# EAGLE board 16 ch sample-and-hold card - single-sided - w logo - panelized (EAGLE 6.5.0), part 1 of 2
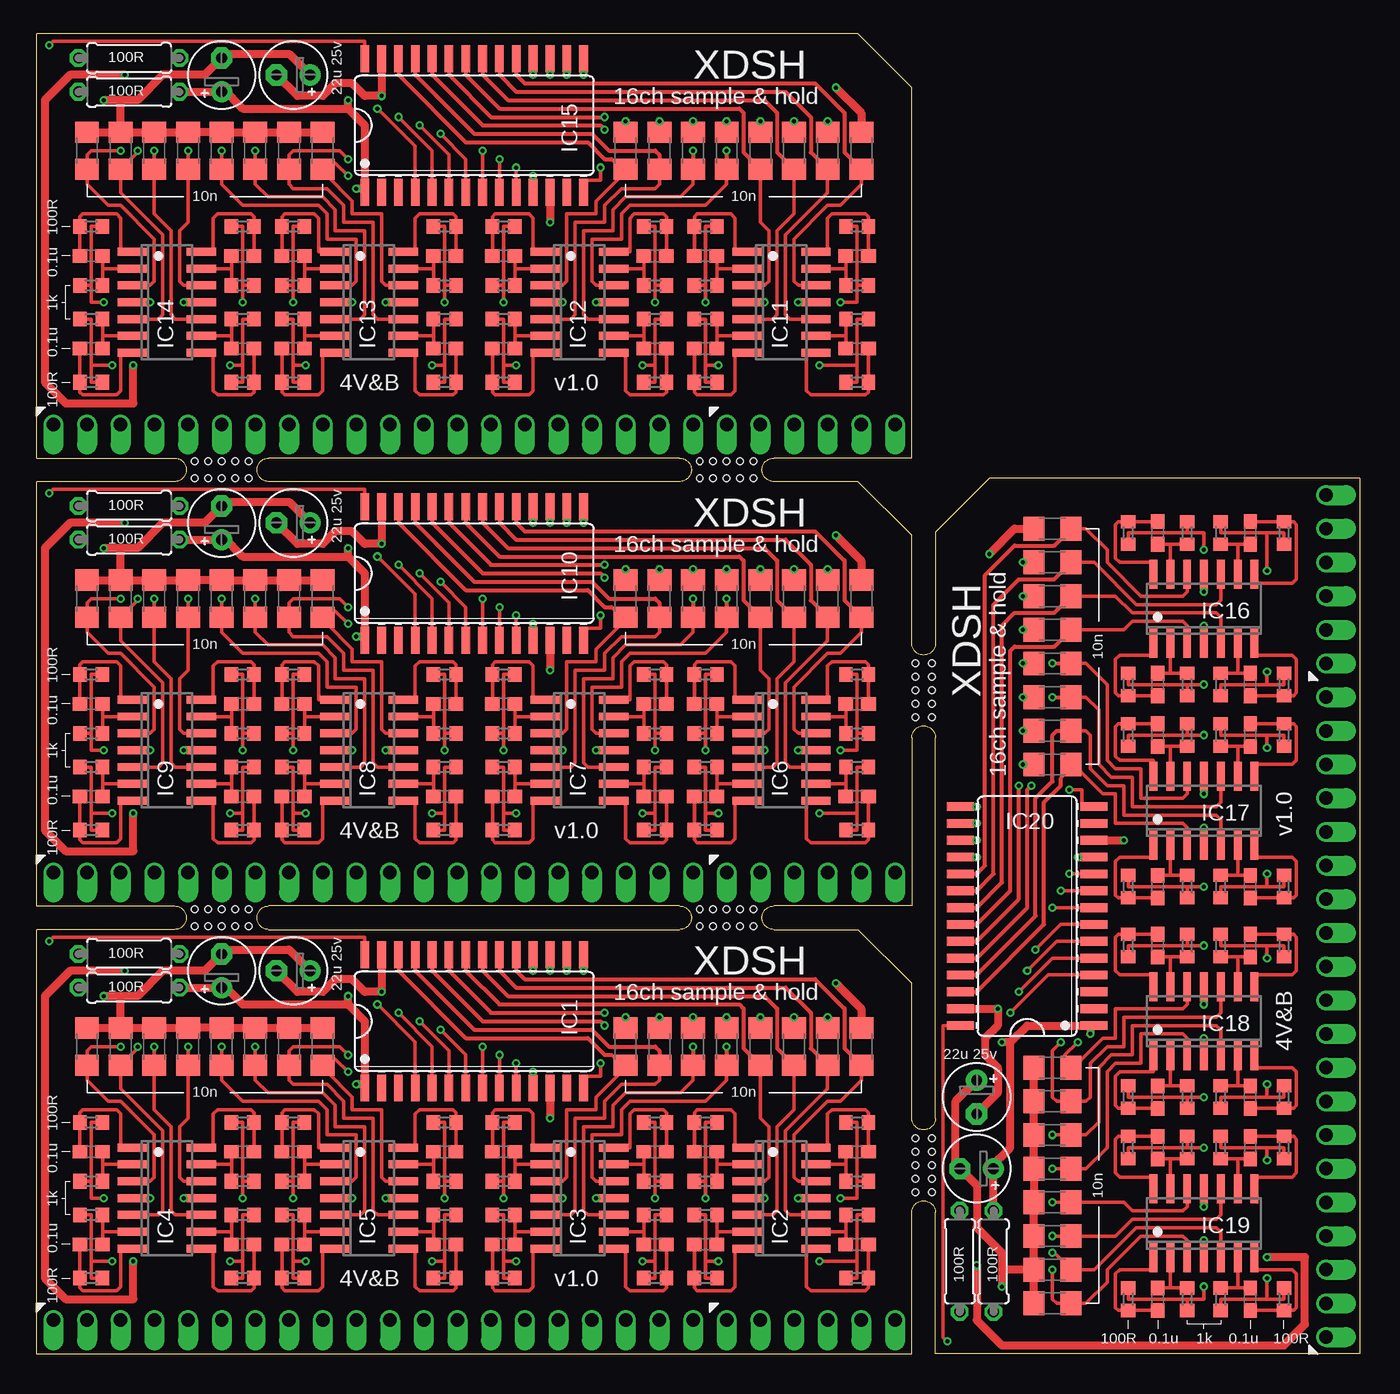
[diagram p0: board, top side]
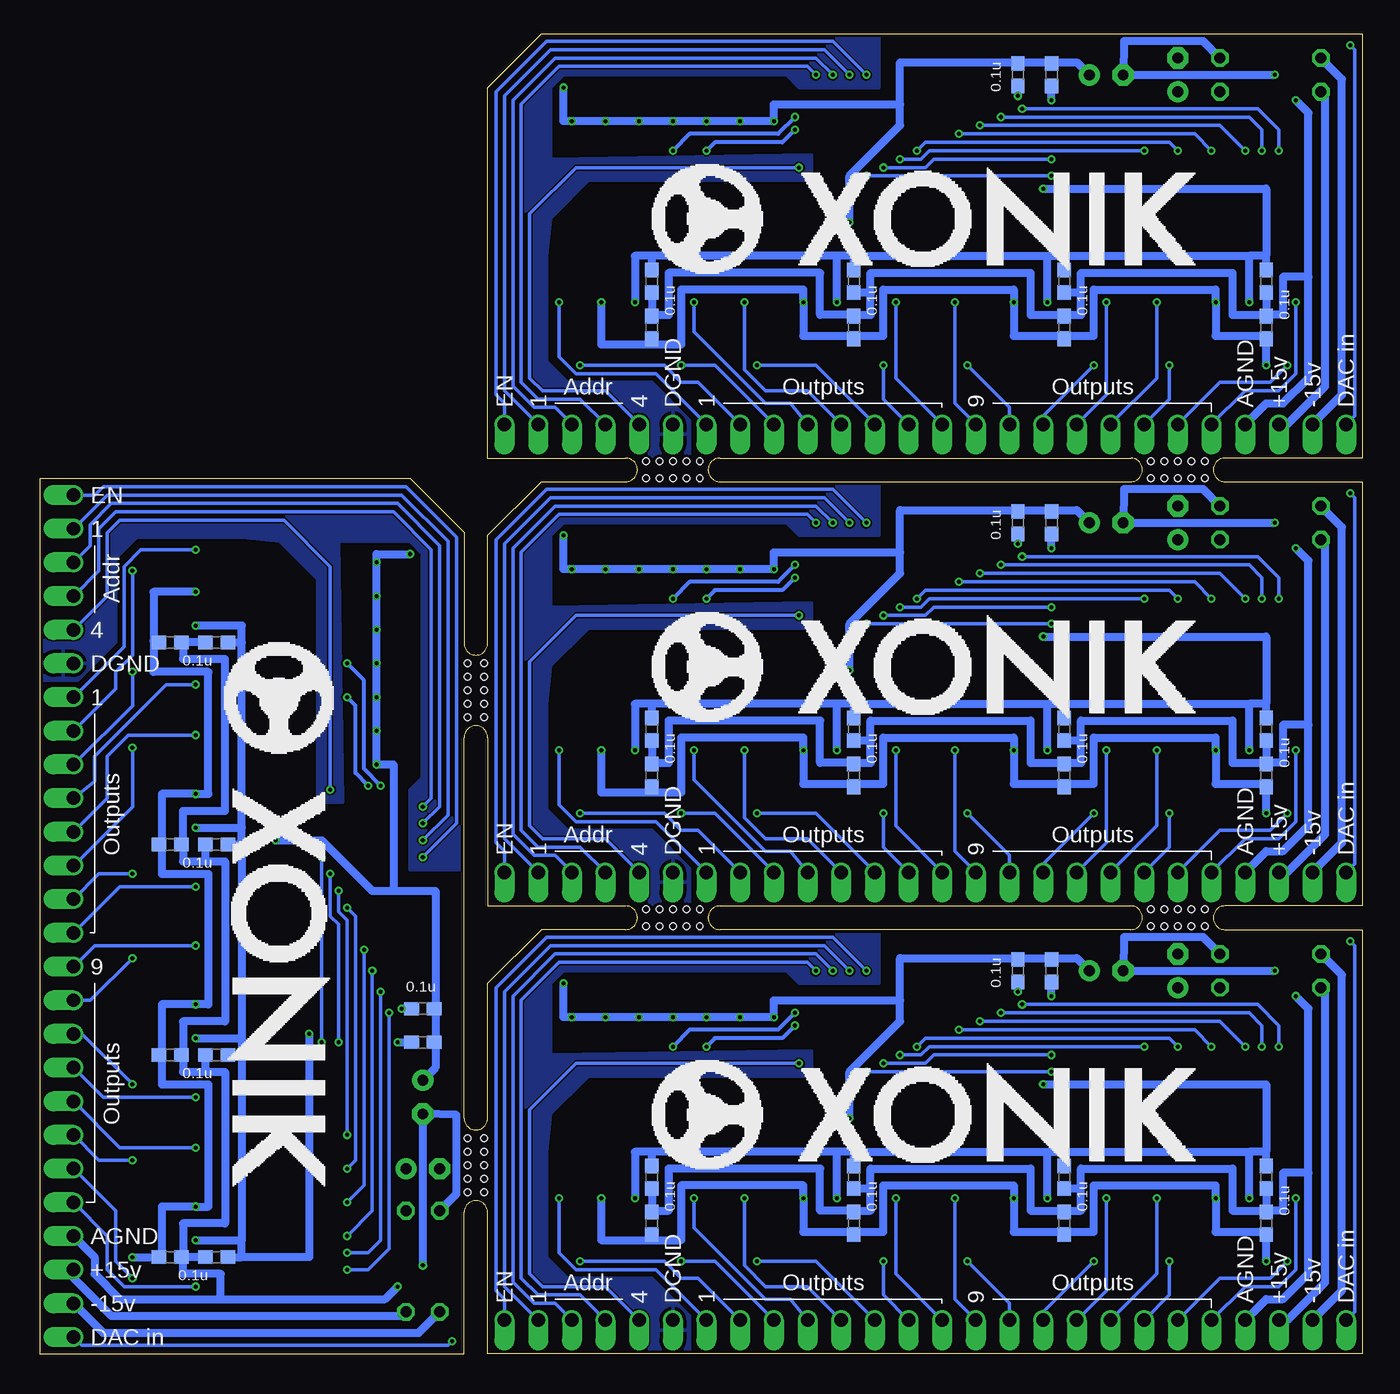
[diagram p1: board, bottom side, seen from below]

Size 99.82 x 99.57 mm. Coordinates in mm from the lower left corner, seen from the top.
Outline: 0,0 66.04,0 66.04,10.67 arc-180 67.82,10.67 67.82,0 99.82,0 99.82,66.04 71.88,66.04 67.82,61.98 67.82,53.59 arc-180 66.04,53.59 66.04,61.72 61.98,65.79 55.63,65.79 arc-180 55.63,67.56 66.04,67.56 66.04,95.5 61.98,99.57 0,99.57 0,67.56 10.41,67.56 arc-180 10.41,65.79 0,65.79 0,33.78 10.41,33.78 arc-180 10.41,32 0,32 0,0
Outline: 66.04,27.94 61.98,32 55.63,32 arc-180 55.63,33.78 66.04,33.78 66.04,46.48 arc-180 67.82,46.48 67.82,17.78 arc-180 66.04,17.78 66.04,27.94
Outline: 17.53,32 arc-180 17.53,33.78 48.51,33.78 arc-180 48.51,32 17.53,32
Outline: 48.51,65.79 17.53,65.79 arc-180 17.53,67.56 48.51,67.56 arc-180 48.51,65.79
Copper layers (1*16): Top 0.035mm / dielectric 1.5mm / Bottom 0.035mm
Design rules "dirt_cheap_dirty_boards.v1": minimum track width 5mil, minimum drill 12mil, track to track 5mil, track to pad 5mil, pad to pad 5mil, via to via 5mil, smd to smd 0mil, copper to edge 10mil, drill to drill 10mil, minimum pad ring 10mil, minimum via ring 6mil, stop-mask expansion 2mil, vias tented up to drill 25mil, thermal gap 10mil
Holes 0.5 mm at 11.94,66.04 12.95,66.04 13.97,66.04 14.99,66.04 16,66.04 50.04,66.04 51.05,66.04 52.07,66.04 53.09,66.04 54.1,66.04 11.94,32.26 12.95,32.26 13.97,32.26 14.99,32.26 16,32.26 16,33.53 14.99,33.53 13.97,33.53 12.95,33.53 11.94,33.53 50.04,32.26 51.05,32.26 52.07,32.26 53.09,32.26 54.1,32.26 54.1,33.53 53.09,33.53 52.07,33.53 51.05,33.53 50.04,33.53 16,67.31 14.99,67.31 13.97,67.31 12.95,67.31 11.94,67.31 54.1,67.31 53.09,67.31 52.07,67.31 51.05,67.31 50.04,67.31 67.56,48.01 67.56,49.02 67.56,50.04 67.56,51.05 67.56,52.07 66.29,52.07 66.29,51.05 66.29,50.04 66.29,49.02 66.29,48.01 67.56,12.19 67.56,13.21 67.56,14.22 67.56,15.24 67.56,16.26 66.29,16.26 66.29,15.24 66.29,14.22 66.29,13.21 66.29,12.19

## Footprints (pad centres in the part's own frame; a part is rotated, then mirrored left to right if it is on the bottom)
C0603 = smd 1.1 x 1: 1 -0.85,0; 2 0.85,0
E2,5-5 = drill 0.813 pad 1.6: + -1.27,0 | drill 0.813 pad 1.6 octagon: - 1.27,0
C1206 = smd 1.6 x 1.8: 1 -1.4,0; 2 1.4,0
SO28L = smd 0.66 x 2.032: 1 -8.255,-5.029; 2 -6.985,-5.029; 3 -5.715,-5.029; 4 -4.445,-5.029; 5 -3.175,-5.029; 6 -1.905,-5.029; 7 -0.635,-5.029; 8 0.635,-5.029; 9 1.905,-5.029; 10 3.175,-5.029; 11 4.445,-5.029; 12 5.715,-5.029; 13 6.985,-5.029; 14 8.255,-5.029; 15 8.255,5.029; 16 6.985,5.029; 17 5.715,5.029; 18 4.445,5.029; 19 3.175,5.029; 20 1.905,5.029; 21 0.635,5.029; 22 -0.635,5.029; 23 -1.905,5.029; 24 -3.175,5.029; 25 -4.445,5.029; 26 -5.715,5.029; 27 -6.985,5.029; 28 -8.255,5.029
SO14 = smd 0.6 x 2.2: 1 -3.81,-2.6; 2 -2.54,-2.6; 3 -1.27,-2.6; 4 0,-2.6; 5 1.27,-2.6; 6 2.54,-2.6; 7 3.81,-2.6; 8 3.81,2.6; 9 2.54,2.6; 10 1.27,2.6; 11 0,2.6; 12 -1.27,2.6; 13 -2.54,2.6; 14 -3.81,2.6
0207/7 = drill 0.813 octagon: 1 -3.81,0; 2 3.81,0
R0603 = smd 1 x 1.1: 1 -0.85,0; 2 0.85,0
SIP-PIN20-1J = drill 1.016 offset: 1 -24.13,0; 2 -21.59,0; 3 -19.05,0; 4 -16.51,0; 5 -13.97,0; 6 -11.43,0; 7 -8.89,0; 8 -6.35,0; 9 -3.81,0; 10 -1.27,0; 11 1.27,0; 12 3.81,0; 13 6.35,0; 14 8.89,0; 15 11.43,0; 16 13.97,0; 17 16.51,0; 18 19.05,0; 19 21.59,0; 20 24.13,0
SIP-PIN06-1J = drill 1.016 offset: 1 -6.35,0; 2 -3.81,0; 3 -1.27,0; 4 1.27,0; 5 3.81,0; 6 6.35,0

## Placement (x,y rotation side)
C1  0.1uF  [C0603]  26.04,28.89 90 bottom
C2  22uF 25V  [E2,5-5]  19.37,28.89 180 top
C3  22uF 25V  [E2,5-5]  13.97,28.89 90 top
C4  10nF  [C1206]  62.23,23.18 270 top
C5  10nF  [C1206]  59.69,23.18 270 top
C6  10nF  [C1206]  57.15,23.18 270 top
C7  10nF  [C1206]  54.61,23.18 270 top
C8  10nF  [C1206]  52.07,23.18 270 top
C9  10nF  [C1206]  49.53,23.18 270 top
C10  10nF  [C1206]  46.99,23.18 270 top
C11  10nF  [C1206]  44.45,23.18 270 top
C12  0.1uF  [C0603]  53.66,13.34 270 bottom
C13  0.1uF  [C0603]  38.42,13.34 270 bottom
C14  0.1uF  [C0603]  61.91,15.24 180 top
C15  0.1uF  [C0603]  61.91,8.26 180 top
C16  0.1uF  [C0603]  50.48,8.26 0 top
C17  0.1uF  [C0603]  50.48,15.24 0 top
C18  0.1uF  [C0603]  46.67,15.24 180 top
C19  0.1uF  [C0603]  46.67,8.26 180 top
C20  0.1uF  [C0603]  35.24,8.26 0 top
C21  0.1uF  [C0603]  35.24,15.24 0 top
C22  10nF  [C1206]  11.43,23.18 270 top
C23  10nF  [C1206]  8.89,23.18 270 top
C24  10nF  [C1206]  6.35,23.18 270 top
C25  10nF  [C1206]  3.81,23.18 270 top
C26  10nF  [C1206]  21.59,23.18 270 top
C27  10nF  [C1206]  19.05,23.18 270 top
C28  10nF  [C1206]  16.51,23.18 270 top
C29  10nF  [C1206]  13.97,23.18 270 top
C30  0.1uF  [C0603]  7.3,13.34 270 bottom
C31  0.1uF  [C0603]  22.54,13.34 270 bottom
C32  0.1uF  [C0603]  15.56,15.24 180 top
C33  0.1uF  [C0603]  15.56,8.26 180 top
C34  0.1uF  [C0603]  4.13,8.26 0 top
C35  0.1uF  [C0603]  4.13,15.24 0 top
C36  0.1uF  [C0603]  30.8,15.24 180 top
C37  0.1uF  [C0603]  30.8,8.26 180 top
C38  0.1uF  [C0603]  19.37,8.26 0 top
C39  0.1uF  [C0603]  19.37,15.24 0 top
C40  0.1uF  [C0603]  23.5,28.89 270 bottom
C41  0.1uF  [C0603]  7.3,9.84 270 bottom
C42  0.1uF  [C0603]  22.54,9.84 270 bottom
C43  0.1uF  [C0603]  38.42,9.84 270 bottom
C44  0.1uF  [C0603]  53.66,9.84 270 bottom
C45  10nF  [C1206]  54.61,56.96 270 top
C46  10nF  [C1206]  57.15,56.96 270 top
C47  10nF  [C1206]  59.69,56.96 270 top
C48  0.1uF  [C0603]  50.48,49.02 0 top
C49  0.1uF  [C0603]  50.48,42.04 0 top
C50  10nF  [C1206]  62.23,56.96 270 top
C51  0.1uF  [C0603]  61.91,42.04 180 top
C52  0.1uF  [C0603]  61.91,49.02 180 top
C53  0.1uF  [C0603]  53.66,47.12 270 bottom
C54  10nF  [C1206]  44.45,56.96 270 top
C55  10nF  [C1206]  46.99,56.96 270 top
C56  10nF  [C1206]  49.53,56.96 270 top
C57  10nF  [C1206]  52.07,56.96 270 top
C58  0.1uF  [C0603]  35.24,49.02 0 top
C59  0.1uF  [C0603]  35.24,42.04 0 top
C60  0.1uF  [C0603]  46.67,42.04 180 top
C61  0.1uF  [C0603]  46.67,49.02 180 top
C62  0.1uF  [C0603]  38.42,47.12 270 bottom
C63  10nF  [C1206]  13.97,56.96 270 top
C64  10nF  [C1206]  16.51,56.96 270 top
C65  10nF  [C1206]  19.05,56.96 270 top
C66  10nF  [C1206]  21.59,56.96 270 top
C67  0.1uF  [C0603]  19.37,49.02 0 top
C68  0.1uF  [C0603]  19.37,42.04 0 top
C69  0.1uF  [C0603]  30.8,42.04 180 top
C70  0.1uF  [C0603]  30.8,49.02 180 top
C71  0.1uF  [C0603]  22.54,47.12 270 bottom
C72  10nF  [C1206]  3.81,56.96 270 top
C73  10nF  [C1206]  6.35,56.96 270 top
C74  10nF  [C1206]  8.89,56.96 270 top
C75  10nF  [C1206]  11.43,56.96 270 top
C76  0.1uF  [C0603]  4.13,49.02 0 top
C77  0.1uF  [C0603]  4.13,42.04 0 top
C78  0.1uF  [C0603]  15.56,42.04 180 top
C79  0.1uF  [C0603]  15.56,49.02 180 top
C80  0.1uF  [C0603]  7.3,47.12 270 bottom
C81  0.1uF  [C0603]  26.04,62.67 90 bottom
C82  22uF 25V  [E2,5-5]  19.37,62.67 180 top
C83  22uF 25V  [E2,5-5]  13.97,62.67 90 top
C84  0.1uF  [C0603]  23.5,62.67 270 bottom
C85  0.1uF  [C0603]  7.3,43.62 270 bottom
C86  0.1uF  [C0603]  22.54,43.62 270 bottom
C87  0.1uF  [C0603]  38.42,43.62 270 bottom
C88  0.1uF  [C0603]  53.66,43.62 270 bottom
C89  10nF  [C1206]  54.61,90.74 270 top
C90  10nF  [C1206]  57.15,90.74 270 top
C91  10nF  [C1206]  59.69,90.74 270 top
C92  0.1uF  [C0603]  50.48,82.8 0 top
C93  0.1uF  [C0603]  50.48,75.82 0 top
C94  10nF  [C1206]  62.23,90.74 270 top
C95  0.1uF  [C0603]  61.91,75.82 180 top
C96  0.1uF  [C0603]  61.91,82.8 180 top
C97  0.1uF  [C0603]  53.66,80.9 270 bottom
C98  10nF  [C1206]  44.45,90.74 270 top
C99  10nF  [C1206]  46.99,90.74 270 top
C100  10nF  [C1206]  49.53,90.74 270 top
C101  10nF  [C1206]  52.07,90.74 270 top
C102  0.1uF  [C0603]  35.24,82.8 0 top
C103  0.1uF  [C0603]  35.24,75.82 0 top
C104  0.1uF  [C0603]  46.67,75.82 180 top
C105  0.1uF  [C0603]  46.67,82.8 180 top
C106  0.1uF  [C0603]  38.42,80.9 270 bottom
C107  10nF  [C1206]  13.97,90.74 270 top
C108  10nF  [C1206]  16.51,90.74 270 top
C109  10nF  [C1206]  19.05,90.74 270 top
C110  10nF  [C1206]  21.59,90.74 270 top
C111  0.1uF  [C0603]  19.37,82.8 0 top
C112  0.1uF  [C0603]  19.37,75.82 0 top
C113  0.1uF  [C0603]  30.8,75.82 180 top
C114  0.1uF  [C0603]  30.8,82.8 180 top
C115  0.1uF  [C0603]  22.54,80.9 270 bottom
C116  10nF  [C1206]  3.81,90.74 270 top
C117  10nF  [C1206]  6.35,90.74 270 top
C118  10nF  [C1206]  8.89,90.74 270 top
C119  10nF  [C1206]  11.43,90.74 270 top
C120  0.1uF  [C0603]  4.13,82.8 0 top
C121  0.1uF  [C0603]  4.13,75.82 0 top
C122  0.1uF  [C0603]  15.56,75.82 180 top
C123  0.1uF  [C0603]  15.56,82.8 180 top
C124  0.1uF  [C0603]  7.3,80.9 270 bottom
C125  0.1uF  [C0603]  26.04,96.46 90 bottom
C126  22uF 25V  [E2,5-5]  19.37,96.46 180 top
C127  22uF 25V  [E2,5-5]  13.97,96.46 90 top
C128  0.1uF  [C0603]  23.5,96.46 270 bottom
C129  0.1uF  [C0603]  7.3,77.41 270 bottom
C130  0.1uF  [C0603]  22.54,77.41 270 bottom
C131  0.1uF  [C0603]  38.42,77.41 270 bottom
C132  0.1uF  [C0603]  53.66,77.41 270 bottom
C133  10nF  [C1206]  76.64,54.61 0 top
C134  10nF  [C1206]  76.64,57.15 0 top
C135  10nF  [C1206]  76.64,59.69 0 top
C136  0.1uF  [C0603]  84.58,50.48 90 top
C137  0.1uF  [C0603]  91.57,50.48 90 top
C138  10nF  [C1206]  76.64,62.23 0 top
C139  0.1uF  [C0603]  91.57,61.91 270 top
C140  0.1uF  [C0603]  84.58,61.91 270 top
C141  0.1uF  [C0603]  86.49,53.66 180 bottom
C142  10nF  [C1206]  76.64,44.45 0 top
C143  10nF  [C1206]  76.64,46.99 0 top
C144  10nF  [C1206]  76.64,49.53 0 top
C145  10nF  [C1206]  76.64,52.07 0 top
C146  0.1uF  [C0603]  84.58,35.24 90 top
C147  0.1uF  [C0603]  91.57,35.24 90 top
C148  0.1uF  [C0603]  91.57,46.67 270 top
C149  0.1uF  [C0603]  84.58,46.67 270 top
C150  0.1uF  [C0603]  86.49,38.42 180 bottom
C151  10nF  [C1206]  76.64,13.97 0 top
C152  10nF  [C1206]  76.64,16.51 0 top
C153  10nF  [C1206]  76.64,19.05 0 top
C154  10nF  [C1206]  76.64,21.59 0 top
C155  0.1uF  [C0603]  84.58,19.37 90 top
C156  0.1uF  [C0603]  91.57,19.37 90 top
C157  0.1uF  [C0603]  91.57,30.8 270 top
C158  0.1uF  [C0603]  84.58,30.8 270 top
C159  0.1uF  [C0603]  86.49,22.54 180 bottom
C160  10nF  [C1206]  76.64,3.81 0 top
C161  10nF  [C1206]  76.64,6.35 0 top
C162  10nF  [C1206]  76.64,8.89 0 top
C163  10nF  [C1206]  76.64,11.43 0 top
C164  0.1uF  [C0603]  84.58,4.13 90 top
C165  0.1uF  [C0603]  91.57,4.13 90 top
C166  0.1uF  [C0603]  91.57,15.56 270 top
C167  0.1uF  [C0603]  84.58,15.56 270 top
C168  0.1uF  [C0603]  86.49,7.3 180 bottom
C169  0.1uF  [C0603]  70.93,26.04 0 bottom
C170  22uF 25V  [E2,5-5]  70.93,19.37 270 top
C171  22uF 25V  [E2,5-5]  70.93,13.97 180 top
C172  0.1uF  [C0603]  70.93,23.5 180 bottom
C173  0.1uF  [C0603]  89.98,7.3 180 bottom
C174  0.1uF  [C0603]  89.98,22.54 180 bottom
C175  0.1uF  [C0603]  89.98,38.42 180 bottom
C176  0.1uF  [C0603]  89.98,53.66 180 bottom
IC1  MAX306CWI  [SO28L]  33.02,25.08 0 top
IC2  TL074D  [SO14]  56.2,11.75 270 top
IC3  TL074D  [SO14]  40.96,11.75 270 top
IC4  TL074D  [SO14]  9.84,11.75 270 top
IC5  TL074D  [SO14]  25.08,11.75 270 top
IC6  TL074D  [SO14]  56.2,45.53 270 top
IC7  TL074D  [SO14]  40.96,45.53 270 top
IC8  TL074D  [SO14]  25.08,45.53 270 top
IC9  TL074D  [SO14]  9.84,45.53 270 top
IC10  MAX306CWI  [SO28L]  33.02,58.86 0 top
IC11  TL074D  [SO14]  56.2,79.31 270 top
IC12  TL074D  [SO14]  40.96,79.31 270 top
IC13  TL074D  [SO14]  25.08,79.31 270 top
IC14  TL074D  [SO14]  9.84,79.31 270 top
IC15  MAX306CWI  [SO28L]  33.02,92.65 0 top
IC16  TL074D  [SO14]  88.07,56.2 0 top
IC17  TL074D  [SO14]  88.07,40.96 0 top
IC18  TL074D  [SO14]  88.07,25.08 0 top
IC19  TL074D  [SO14]  88.07,9.84 0 top
IC20  MAX306CWI  [SO28L]  74.74,33.02 90 top
R1  100R  [0207/7]  6.99,30.16 180 top
R2  100R  [0207/7]  6.99,27.62 180 top
R3  1k  [R0603]  61.91,13.02 0 top
R4  100R  [R0603]  61.91,17.46 180 top
R5  1k  [R0603]  61.91,10.48 0 top
R6  100R  [R0603]  61.91,5.71 180 top
R7  1k  [R0603]  50.48,10.48 180 top
R8  100R  [R0603]  50.48,5.71 0 top
R9  1k  [R0603]  50.48,13.02 180 top
R10  100R  [R0603]  50.48,17.46 0 top
R11  1k  [R0603]  46.67,13.02 0 top
R12  100R  [R0603]  46.67,17.46 180 top
R13  1k  [R0603]  46.67,10.48 0 top
R14  100R  [R0603]  46.67,5.71 180 top
R15  1k  [R0603]  35.24,10.48 180 top
R16  100R  [R0603]  35.24,5.71 0 top
R17  1k  [R0603]  35.24,13.02 180 top
R18  100R  [R0603]  35.24,17.46 0 top
R19  1k  [R0603]  15.56,13.02 0 top
R20  100R  [R0603]  15.56,17.46 180 top
R21  1k  [R0603]  15.56,10.48 0 top
R22  100R  [R0603]  15.56,5.71 180 top
R23  1k  [R0603]  4.13,10.48 180 top
R24  100R  [R0603]  4.13,5.71 0 top
R25  1k  [R0603]  4.13,13.02 180 top
R26  100R  [R0603]  4.13,17.46 0 top
R27  1k  [R0603]  30.8,13.02 0 top
R28  100R  [R0603]  30.8,17.46 180 top
R29  1k  [R0603]  30.8,10.48 0 top
R30  100R  [R0603]  30.8,5.71 180 top
R31  1k  [R0603]  19.37,10.48 180 top
R32  100R  [R0603]  19.37,5.71 0 top
R33  1k  [R0603]  19.37,13.02 180 top
R34  100R  [R0603]  19.37,17.46 0 top
R35  100R  [R0603]  50.48,51.24 0 top
R36  1k  [R0603]  50.48,46.8 180 top
R37  100R  [R0603]  50.48,39.5 0 top
R38  1k  [R0603]  50.48,44.26 180 top
R39  100R  [R0603]  61.91,39.5 180 top
R40  1k  [R0603]  61.91,44.26 0 top
R41  1k  [R0603]  61.91,46.8 0 top
R42  100R  [R0603]  61.91,51.24 180 top
R43  100R  [R0603]  35.24,51.24 0 top
R44  1k  [R0603]  35.24,46.8 180 top
R45  100R  [R0603]  35.24,39.5 0 top
R46  1k  [R0603]  35.24,44.26 180 top
R47  100R  [R0603]  46.67,39.5 180 top
R48  1k  [R0603]  46.67,44.26 0 top
R49  1k  [R0603]  46.67,46.8 0 top
R50  100R  [R0603]  46.67,51.24 180 top
R51  100R  [R0603]  19.37,51.24 0 top
R52  1k  [R0603]  19.37,46.8 180 top
R53  100R  [R0603]  19.37,39.5 0 top
R54  1k  [R0603]  19.37,44.26 180 top
R55  100R  [R0603]  30.8,39.5 180 top
R56  1k  [R0603]  30.8,44.26 0 top
R57  1k  [R0603]  30.8,46.8 0 top
R58  100R  [R0603]  30.8,51.24 180 top
R59  100R  [R0603]  4.13,51.24 0 top
R60  1k  [R0603]  4.13,46.8 180 top
R61  100R  [R0603]  4.13,39.5 0 top
R62  1k  [R0603]  4.13,44.26 180 top
R63  100R  [R0603]  15.56,39.5 180 top
R64  1k  [R0603]  15.56,44.26 0 top
R65  1k  [R0603]  15.56,46.8 0 top
R66  100R  [R0603]  15.56,51.24 180 top
R67  100R  [0207/7]  6.99,61.4 180 top
R68  100R  [0207/7]  6.99,63.94 180 top
R69  100R  [R0603]  50.48,85.03 0 top
R70  1k  [R0603]  50.48,80.58 180 top
R71  100R  [R0603]  50.48,73.28 0 top
R72  1k  [R0603]  50.48,78.04 180 top
R73  100R  [R0603]  61.91,73.28 180 top
R74  1k  [R0603]  61.91,78.04 0 top
R75  1k  [R0603]  61.91,80.58 0 top
R76  100R  [R0603]  61.91,85.03 180 top
R77  100R  [R0603]  35.24,85.03 0 top
R78  1k  [R0603]  35.24,80.58 180 top
R79  100R  [R0603]  35.24,73.28 0 top
R80  1k  [R0603]  35.24,78.04 180 top
R81  100R  [R0603]  46.67,73.28 180 top
R82  1k  [R0603]  46.67,78.04 0 top
R83  1k  [R0603]  46.67,80.58 0 top
R84  100R  [R0603]  46.67,85.03 180 top
R85  100R  [R0603]  19.37,85.03 0 top
R86  1k  [R0603]  19.37,80.58 180 top
R87  100R  [R0603]  19.37,73.28 0 top
R88  1k  [R0603]  19.37,78.04 180 top
R89  100R  [R0603]  30.8,73.28 180 top
R90  1k  [R0603]  30.8,78.04 0 top
R91  1k  [R0603]  30.8,80.58 0 top
R92  100R  [R0603]  30.8,85.03 180 top
R93  100R  [R0603]  4.13,85.03 0 top
R94  1k  [R0603]  4.13,80.58 180 top
R95  100R  [R0603]  4.13,73.28 0 top
R96  1k  [R0603]  4.13,78.04 180 top
R97  100R  [R0603]  15.56,73.28 180 top
R98  1k  [R0603]  15.56,78.04 0 top
R99  1k  [R0603]  15.56,80.58 0 top
R100  100R  [R0603]  15.56,85.03 180 top
R101  100R  [0207/7]  6.99,95.19 180 top
R102  100R  [0207/7]  6.99,97.73 180 top
R103  100R  [R0603]  82.36,50.48 90 top
R104  1k  [R0603]  86.8,50.48 270 top
R105  100R  [R0603]  94.11,50.48 90 top
R106  1k  [R0603]  89.34,50.48 270 top
R107  100R  [R0603]  94.11,61.91 270 top
R108  1k  [R0603]  89.34,61.91 90 top
R109  1k  [R0603]  86.8,61.91 90 top
R110  100R  [R0603]  82.36,61.91 270 top
R111  100R  [R0603]  82.36,35.24 90 top
R112  1k  [R0603]  86.8,35.24 270 top
R113  100R  [R0603]  94.11,35.24 90 top
R114  1k  [R0603]  89.34,35.24 270 top
R115  100R  [R0603]  94.11,46.67 270 top
R116  1k  [R0603]  89.34,46.67 90 top
R117  1k  [R0603]  86.8,46.67 90 top
R118  100R  [R0603]  82.36,46.67 270 top
R119  100R  [R0603]  82.36,19.37 90 top
R120  1k  [R0603]  86.8,19.37 270 top
R121  100R  [R0603]  94.11,19.37 90 top
R122  1k  [R0603]  89.34,19.37 270 top
R123  100R  [R0603]  94.11,30.8 270 top
R124  1k  [R0603]  89.34,30.8 90 top
R125  1k  [R0603]  86.8,30.8 90 top
R126  100R  [R0603]  82.36,30.8 270 top
R127  100R  [R0603]  82.36,4.13 90 top
R128  1k  [R0603]  86.8,4.13 270 top
R129  100R  [R0603]  94.11,4.13 90 top
R130  1k  [R0603]  89.34,4.13 270 top
R131  100R  [R0603]  94.11,15.56 270 top
R132  1k  [R0603]  89.34,15.56 90 top
R133  1k  [R0603]  86.8,15.56 90 top
R134  100R  [R0603]  82.36,15.56 270 top
R135  100R  [0207/7]  72.2,6.99 270 top
R136  100R  [0207/7]  69.66,6.99 270 top
SV1  [SIP-PIN20-1J]  25.4,2.54 0 top
SV2  [SIP-PIN20-1J]  25.4,36.32 0 top
SV3  [SIP-PIN20-1J]  25.4,70.1 0 top
SV4  [SIP-PIN20-1J]  97.28,25.4 90 top
U$1  MA06-1JP  [SIP-PIN06-1J]  58.42,2.54 0 top
U$2  MA06-1JP  [SIP-PIN06-1J]  58.42,36.32 0 top
U$3  MA06-1JP  [SIP-PIN06-1J]  58.42,70.1 0 top
U$4  MA06-1JP  [SIP-PIN06-1J]  97.28,58.42 90 top

## Library data of the parts
C1-C176 R1-R136 = resistor
IC1 IC10 IC15 IC20 = maxim; MF: MAXIM; MPN: MAX306CWI; OC_FARNELL: unknown; OC_NEWARK: 90C2555
IC2-IC9 IC11-IC14 IC16-IC19 = linear
SV1-SV4 U$1-U$4 = joakim

## Nets
+15V: C3.+ C12.1 C13.1 C30.1 C31.1 C40.2 IC1.1 IC2.4 IC3.4 IC4.4 IC5.4 R2.1
+15V1: C53.1 C62.1 C71.1 C80.1 C83.+ C84.2 IC6.4 IC7.4 IC8.4 IC9.4 IC10.1 R67.1
+15V2: C97.1 C106.1 C115.1 C124.1 C127.+ C128.2 IC11.4 IC12.4 IC13.4 IC14.4 IC15.1 R101.1
+15V3: C141.1 C150.1 C159.1 C168.1 C171.+ C172.2 IC16.4 IC17.4 IC18.4 IC19.4 IC20.1 R135.1
-15V: C1.1 C2.- C41.2 C42.2 C43.2 C44.2 IC1.27 IC2.11 IC3.11 IC4.11 IC5.11 R1.1
-15V1: C81.1 C82.- C85.2 C86.2 C87.2 C88.2 IC6.11 IC7.11 IC8.11 IC9.11 IC10.27 R68.1
-15V2: C125.1 C126.- C129.2 C130.2 C131.2 C132.2 IC11.11 IC12.11 IC13.11 IC14.11 IC15.27 R102.1
-15V3: C169.1 C170.- C173.2 C174.2 C175.2 C176.2 IC16.11 IC17.11 IC18.11 IC19.11 IC20.27 R136.1
A0: IC1.17 U$1.5
A1: IC1.16 U$1.4
A2: IC1.15 U$1.3
A3: IC1.14 U$1.2
A4: IC10.14 U$2.2
A5: IC10.17 U$2.5
A6: IC10.16 U$2.4
A7: IC10.15 U$2.3
A8: IC15.14 U$3.2
A9: IC15.17 U$3.5
A10: IC15.16 U$3.4
A11: IC15.15 U$3.3
A12: IC20.14 U$4.2
A13: IC20.17 U$4.5
A14: IC20.16 U$4.4
A15: IC20.15 U$4.3
AGND: C1.2 C2.+ C3.- C4.1 C5.1 C6.1 C7.1 C8.1 C9.1 C10.1 C11.1 C12.2 C13.2 C22.1 C23.1 C24.1 C25.1 C26.1 C27.1 C28.1 C29.1 C30.2 C31.2 C40.1 C41.1 C42.1 C43.1 C44.1 IC1.12 SV1.4
AGND1: C45.1 C46.1 C47.1 C50.1 C53.2 C54.1 C55.1 C56.1 C57.1 C62.2 C63.1 C64.1 C65.1 C66.1 C71.2 C72.1 C73.1 C74.1 C75.1 C80.2 C81.2 C82.+ C83.- C84.1 C85.1 C86.1 C87.1 C88.1 IC10.12 SV2.4
AGND2: C89.1 C90.1 C91.1 C94.1 C97.2 C98.1 C99.1 C100.1 C101.1 C106.2 C107.1 C108.1 C109.1 C110.1 C115.2 C116.1 C117.1 C118.1 C119.1 C124.2 C125.2 C126.+ C127.- C128.1 C129.1 C130.1 C131.1 C132.1 IC15.12 SV3.4
AGND3: C133.1 C134.1 C135.1 C138.1 C141.2 C142.1 C143.1 C144.1 C145.1 C150.2 C151.1 C152.1 C153.1 C154.1 C159.2 C160.1 C161.1 C162.1 C163.1 C168.2 C169.2 C170.+ C171.- C172.1 C173.1 C174.1 C175.1 C176.1 IC20.12 SV4.4
DAC: IC1.28 SV1.1
DAC1: IC10.28 SV2.1
DAC2: IC15.28 SV3.1
DAC3: IC20.28 SV4.1
DGND: U$1.1
DGND1: U$2.1
DGND2: U$3.1
DGND3: U$4.1
EN: IC1.18 U$1.6
EN1: IC10.18 U$2.6
EN2: IC15.18 U$3.6
EN3: IC20.18 U$4.6
IN1: C4.2 IC1.19 IC2.12
IN2: C50.2 IC6.12 IC10.19
IN3: C5.2 IC1.20 IC2.10
IN4: C6.2 IC1.21 IC2.5
IN5: C47.2 IC6.10 IC10.20
IN6: C7.2 IC1.22 IC2.3
IN7: C46.2 IC6.5 IC10.21
IN8: C45.2 IC6.3 IC10.22
IN9: C8.2 IC1.23 IC3.12
IN10: C57.2 IC7.12 IC10.23
IN11: C9.2 IC1.24 IC3.10
IN12: C10.2 IC1.25 IC3.5
IN13: C56.2 IC7.10 IC10.24
IN14: C11.2 IC1.26 IC3.3
IN15: C55.2 IC7.5 IC10.25
IN16: C54.2 IC7.3 IC10.26
IN17: C26.2 IC1.11 IC5.12
IN18: C63.2 IC8.3 IC10.8
IN19: C27.2 IC1.10 IC5.10
IN20: C28.2 IC1.9 IC5.5
IN21: C64.2 IC8.5 IC10.9
IN22: C29.2 IC1.8 IC5.3
IN23: C65.2 IC8.10 IC10.10
IN24: C66.2 IC8.12 IC10.11
IN25: C22.2 IC1.7 IC4.12
IN26: C72.2 IC9.3 IC10.4
IN27: C23.2 IC1.6 IC4.10
IN28: C24.2 IC1.5 IC4.5
IN29: C73.2 IC9.5 IC10.5
IN30: C25.2 IC1.4 IC4.3
IN31: C74.2 IC9.10 IC10.6
IN32: C75.2 IC9.12 IC10.7
IN33: C94.2 IC11.12 IC15.19
IN34: C91.2 IC11.10 IC15.20
IN35: C90.2 IC11.5 IC15.21
IN36: C89.2 IC11.3 IC15.22
IN37: C101.2 IC12.12 IC15.23
IN38: C100.2 IC12.10 IC15.24
IN39: C99.2 IC12.5 IC15.25
IN40: C98.2 IC12.3 IC15.26
IN41: C107.2 IC13.3 IC15.8
IN42: C108.2 IC13.5 IC15.9
IN43: C109.2 IC13.10 IC15.10
IN44: C110.2 IC13.12 IC15.11
IN45: C116.2 IC14.3 IC15.4
IN46: C117.2 IC14.5 IC15.5
IN47: C118.2 IC14.10 IC15.6
IN48: C119.2 IC14.12 IC15.7
IN49: C138.2 IC16.12 IC20.19
IN50: C135.2 IC16.10 IC20.20
IN51: C134.2 IC16.5 IC20.21
IN52: C133.2 IC16.3 IC20.22
IN53: C145.2 IC17.12 IC20.23
IN54: C144.2 IC17.10 IC20.24
IN55: C143.2 IC17.5 IC20.25
IN56: C142.2 IC17.3 IC20.26
IN57: C151.2 IC18.3 IC20.8
IN58: C152.2 IC18.5 IC20.9
IN59: C153.2 IC18.10 IC20.10
IN60: C154.2 IC18.12 IC20.11
IN61: C160.2 IC19.3 IC20.4
IN62: C161.2 IC19.5 IC20.5
IN63: C162.2 IC19.10 IC20.6
IN64: C163.2 IC19.12 IC20.7
N$1: C17.2 IC2.2 R9.1
N$2: C17.1 IC2.1 R10.1
N$3: C16.1 IC2.7 R8.1
N$4: C15.1 IC2.8 R6.1
N$5: C16.2 IC2.6 R7.1
N$6: C14.1 IC2.14 R4.1
N$7: C15.2 IC2.9 R5.1
N$8: C14.2 IC2.13 R3.1
N$9: C21.1 IC3.1 R18.1
N$10: C21.2 IC3.2 R17.1
N$11: C48.1 IC6.1 R35.1
N$12: C48.2 IC6.2 R36.1
N$13: C49.1 IC6.7 R37.1
N$14: C49.2 IC6.6 R38.1
N$15: C51.1 IC6.8 R39.1
N$16: C52.1 IC6.14 R42.1
N$17: C51.2 IC6.9 R40.1
N$18: C52.2 IC6.13 R41.1
N$19: C20.1 IC3.7 R16.1
N$20: C20.2 IC3.6 R15.1
N$21: C19.1 IC3.8 R14.1
N$22: C18.1 IC3.14 R12.1
N$23: C19.2 IC3.9 R13.1
N$24: C18.2 IC3.13 R11.1
N$25: C58.1 IC7.1 R43.1
N$26: C58.2 IC7.2 R44.1
N$27: C59.1 IC7.7 R45.1
N$28: C59.2 IC7.6 R46.1
N$29: C60.1 IC7.8 R47.1
N$30: C61.1 IC7.14 R50.1
N$31: C60.2 IC7.9 R48.1
N$32: C61.2 IC7.13 R49.1
N$33: C39.1 IC5.1 R34.1
N$34: C39.2 IC5.2 R33.1
N$35: C38.1 IC5.7 R32.1
N$36: C38.2 IC5.6 R31.1
N$37: C37.1 IC5.8 R30.1
N$38: C36.1 IC5.14 R28.1
N$39: C37.2 IC5.9 R29.1
N$40: C36.2 IC5.13 R27.1
N$41: C67.1 IC8.1 R51.1
N$42: C67.2 IC8.2 R52.1
N$43: C68.1 IC8.7 R53.1
N$44: C68.2 IC8.6 R54.1
N$45: C69.1 IC8.8 R55.1
N$46: C70.1 IC8.14 R58.1
N$47: C69.2 IC8.9 R56.1
N$48: C70.2 IC8.13 R57.1
N$49: C35.1 IC4.1 R26.1
N$50: C35.2 IC4.2 R25.1
N$51: C34.1 IC4.7 R24.1
N$52: C34.2 IC4.6 R23.1
N$53: C33.1 IC4.8 R22.1
N$54: C32.1 IC4.14 R20.1
N$55: C33.2 IC4.9 R21.1
N$56: C32.2 IC4.13 R19.1
N$57: C76.1 IC9.1 R59.1
N$58: C76.2 IC9.2 R60.1
N$59: C77.1 IC9.7 R61.1
N$60: C77.2 IC9.6 R62.1
N$61: C78.1 IC9.8 R63.1
N$62: C79.1 IC9.14 R66.1
N$63: C78.2 IC9.9 R64.1
N$64: C79.2 IC9.13 R65.1
N$65: C92.1 IC11.1 R69.1
N$66: C92.2 IC11.2 R70.1
N$67: C93.1 IC11.7 R71.1
N$68: C93.2 IC11.6 R72.1
N$69: C95.1 IC11.8 R73.1
N$70: C96.1 IC11.14 R76.1
N$71: C95.2 IC11.9 R74.1
N$72: C96.2 IC11.13 R75.1
N$73: C102.1 IC12.1 R77.1
N$74: C102.2 IC12.2 R78.1
N$75: C103.1 IC12.7 R79.1
N$76: C103.2 IC12.6 R80.1
N$77: C104.1 IC12.8 R81.1
N$78: C105.1 IC12.14 R84.1
N$79: C104.2 IC12.9 R82.1
N$80: C105.2 IC12.13 R83.1
N$81: C111.1 IC13.1 R85.1
N$82: C111.2 IC13.2 R86.1
N$83: C112.1 IC13.7 R87.1
N$84: C112.2 IC13.6 R88.1
N$85: C113.1 IC13.8 R89.1
N$86: C114.1 IC13.14 R92.1
N$87: C113.2 IC13.9 R90.1
N$88: C114.2 IC13.13 R91.1
N$89: C120.1 IC14.1 R93.1
N$90: C120.2 IC14.2 R94.1
N$91: C121.1 IC14.7 R95.1
N$92: C121.2 IC14.6 R96.1
N$93: C122.1 IC14.8 R97.1
N$94: C123.1 IC14.14 R100.1
N$95: C122.2 IC14.9 R98.1
N$96: C123.2 IC14.13 R99.1
N$97: C136.1 IC16.1 R103.1
N$98: C136.2 IC16.2 R104.1
N$99: C137.1 IC16.7 R105.1
N$100: C137.2 IC16.6 R106.1
N$101: C139.1 IC16.8 R107.1
N$102: C140.1 IC16.14 R110.1
N$103: C139.2 IC16.9 R108.1
N$104: C140.2 IC16.13 R109.1
N$105: C146.1 IC17.1 R111.1
N$106: C146.2 IC17.2 R112.1
N$107: C147.1 IC17.7 R113.1
N$108: C147.2 IC17.6 R114.1
N$109: C148.1 IC17.8 R115.1
N$110: C149.1 IC17.14 R118.1
N$111: C148.2 IC17.9 R116.1
N$112: C149.2 IC17.13 R117.1
N$113: C155.1 IC18.1 R119.1
N$114: C155.2 IC18.2 R120.1
N$115: C156.1 IC18.7 R121.1
N$116: C156.2 IC18.6 R122.1
N$117: C157.1 IC18.8 R123.1
N$118: C158.1 IC18.14 R126.1
N$119: C157.2 IC18.9 R124.1
N$120: C158.2 IC18.13 R125.1
N$121: C164.1 IC19.1 R127.1
N$122: C164.2 IC19.2 R128.1
N$123: C165.1 IC19.7 R129.1
N$124: C165.2 IC19.6 R130.1
N$125: C166.1 IC19.8 R131.1
N$126: C167.1 IC19.14 R134.1
N$127: C166.2 IC19.9 R132.1
N$128: C167.2 IC19.13 R133.1
OUT0: R3.2 R4.2 SV1.20
OUT1: R5.2 R6.2 SV1.19
OUT2: R41.2 R42.2 SV2.20
OUT3: R37.2 R38.2 SV2.18
OUT4: R35.2 R36.2 SV2.17
OUT5: R39.2 R40.2 SV2.19
OUT6: R7.2 R8.2 SV1.18
OUT7: R9.2 R10.2 SV1.17
OUT8: R11.2 R12.2 SV1.16
OUT9: R13.2 R14.2 SV1.15
OUT10: R43.2 R44.2 SV2.13
OUT11: R45.2 R46.2 SV2.14
OUT12: R47.2 R48.2 SV2.15
OUT13: R49.2 R50.2 SV2.16
OUT14: R15.2 R16.2 SV1.14
OUT15: R17.2 R18.2 SV1.13
OUT16: R27.2 R28.2 SV1.12
OUT17: R29.2 R30.2 SV1.11
OUT18: R51.2 R52.2 SV2.9
OUT19: R53.2 R54.2 SV2.10
OUT20: R55.2 R56.2 SV2.11
OUT21: R57.2 R58.2 SV2.12
OUT22: R31.2 R32.2 SV1.10
OUT23: R33.2 R34.2 SV1.9
OUT24: R19.2 R20.2 SV1.8
OUT25: R21.2 R22.2 SV1.7
OUT26: R59.2 R60.2 SV2.5
OUT27: R61.2 R62.2 SV2.6
OUT28: R63.2 R64.2 SV2.7
OUT29: R65.2 R66.2 SV2.8
OUT30: R23.2 R24.2 SV1.6
OUT31: R25.2 R26.2 SV1.5
OUT32: R75.2 R76.2 SV3.20
OUT33: R71.2 R72.2 SV3.18
OUT34: R69.2 R70.2 SV3.17
OUT35: R73.2 R74.2 SV3.19
OUT36: R77.2 R78.2 SV3.13
OUT37: R79.2 R80.2 SV3.14
OUT38: R81.2 R82.2 SV3.15
OUT39: R83.2 R84.2 SV3.16
OUT40: R85.2 R86.2 SV3.9
OUT41: R87.2 R88.2 SV3.10
OUT42: R89.2 R90.2 SV3.11
OUT43: R91.2 R92.2 SV3.12
OUT44: R93.2 R94.2 SV3.5
OUT45: R95.2 R96.2 SV3.6
OUT46: R97.2 R98.2 SV3.7
OUT47: R99.2 R100.2 SV3.8
OUT48: R109.2 R110.2 SV4.20
OUT49: R105.2 R106.2 SV4.18
OUT50: R103.2 R104.2 SV4.17
OUT51: R107.2 R108.2 SV4.19
OUT52: R111.2 R112.2 SV4.13
OUT53: R113.2 R114.2 SV4.14
OUT54: R115.2 R116.2 SV4.15
OUT55: R117.2 R118.2 SV4.16
OUT56: R119.2 R120.2 SV4.9
OUT57: R121.2 R122.2 SV4.10
OUT58: R123.2 R124.2 SV4.11
OUT59: R125.2 R126.2 SV4.12
OUT60: R127.2 R128.2 SV4.5
OUT61: R129.2 R130.2 SV4.6
OUT62: R131.2 R132.2 SV4.7
OUT63: R133.2 R134.2 SV4.8
V+: R2.2 SV1.3
V+1: R67.2 SV2.3
V+2: R101.2 SV3.3
V+3: R135.2 SV4.3
V-: R1.2 SV1.2
V-1: R68.2 SV2.2
V-2: R102.2 SV3.2
V-3: R136.2 SV4.2

## Tracks (layer width: path | path; a pad name or v marks a point on that pad's centre or on a via)
+15V  (via drill 0.3)
  Top 0.61: IC2.4 v54.93,11.75 | IC5.4 v23.81,11.75 | IC4.4 v8.57,11.75 | IC3.4 v39.69,11.75 | 23.5,26.35 15.56,26.35 14.03,27.88 C3.+ R2.1 | 23.5,26.35 24.77,25.08 24.77,20.32 | IC1.1 24.77,20.32 | 24.77,20.32 v24.13,20.32 | 23.5,26.35 v23.5,26.99
  Bottom 0.61: v23.81,11.75 23.81,15.24 | v8.57,11.75 8.57,15.24 | 39.69,15.24 53.66,15.24 | 53.66,15.24 54.93,15.24 v54.93,11.75 | 38.42,15.24 23.81,15.24 | C12.1 53.66,15.24 | C13.1 38.42,15.24 | v39.69,11.75 39.69,15.24 | 38.42,15.24 39.69,15.24 | 23.81,15.24 22.54,15.24 | 22.54,15.24 8.57,15.24 | C30.1 7.3,15.24 | 7.3,15.24 8.57,15.24 | v24.13,20.32 7.3,20.32 7.3,15.24 | v23.5,26.99 C40.2 | C31.1 22.54,15.24
+15V1  (via drill 0.3)
  Top 0.61: IC6.4 v54.93,45.53 | IC8.4 v23.81,45.53 | IC9.4 v8.57,45.53 | IC7.4 v39.69,45.53 | 23.5,60.13 15.56,60.13 14.03,61.66 C83.+ R67.1 | 23.5,60.13 24.77,58.86 24.77,54.1 | IC10.1 24.77,54.1 | 24.77,54.1 v24.13,54.1 | 23.5,60.13 v23.5,60.77
  Bottom 0.61: v23.81,45.53 23.81,49.02 | v8.57,45.53 8.57,49.02 | 39.69,49.02 53.66,49.02 | 53.66,49.02 54.93,49.02 v54.93,45.53 | 38.42,49.02 23.81,49.02 | C53.1 53.66,49.02 | C62.1 38.42,49.02 | v39.69,45.53 39.69,49.02 | 38.42,49.02 39.69,49.02 | 23.81,49.02 22.54,49.02 | 22.54,49.02 8.57,49.02 | C80.1 7.3,49.02 | 7.3,49.02 8.57,49.02 | v24.13,54.1 7.3,54.1 7.3,49.02 | v23.5,60.77 C84.2 | C71.1 22.54,49.02
+15V2  (via drill 0.3)
  Top 0.61: IC11.4 v54.93,79.31 | IC13.4 v23.81,79.31 | IC14.4 v8.57,79.31 | IC12.4 v39.69,79.31 | 23.5,93.92 15.56,93.92 14.03,95.44 C127.+ R101.1 | 23.5,93.92 24.77,92.65 24.77,87.88 | IC15.1 24.77,87.88 | 24.77,87.88 v24.13,87.88 | 23.5,93.92 v23.5,94.55
  Bottom 0.61: v23.81,79.31 23.81,82.8 | v8.57,79.31 8.57,82.8 | 39.69,82.8 53.66,82.8 | 53.66,82.8 54.93,82.8 v54.93,79.31 | 38.42,82.8 23.81,82.8 | C97.1 53.66,82.8 | C106.1 38.42,82.8 | v39.69,79.31 39.69,82.8 | 38.42,82.8 39.69,82.8 | 23.81,82.8 22.54,82.8 | 22.54,82.8 8.57,82.8 | C124.1 7.3,82.8 | 7.3,82.8 8.57,82.8 | v24.13,87.88 7.3,87.88 7.3,82.8 | v23.5,94.55 C128.2 | C115.1 22.54,82.8
+15V3  (via drill 0.3)
  Top 0.61: IC16.4 v88.08,54.93 | IC18.4 v88.08,23.81 | IC19.4 v88.08,8.57 | IC17.4 v88.08,39.69 | 73.47,23.5 73.47,15.56 71.94,14.03 C171.+ R135.1 | 73.47,23.5 74.74,24.77 79.5,24.77 | IC20.1 79.5,24.77 | 79.5,24.77 v79.5,24.13 | 73.47,23.5 v72.83,23.5
  Bottom 0.61: v88.08,23.81 84.58,23.81 | v88.08,8.57 84.58,8.57 | 84.58,39.69 84.58,53.66 | 84.58,53.66 84.58,54.93 v88.08,54.93 | 84.58,38.42 84.58,23.81 | C141.1 84.58,53.66 | C150.1 84.58,38.42 | v88.08,39.69 84.58,39.69 | 84.58,38.42 84.58,39.69 | 84.58,23.81 84.58,22.54 | 84.58,22.54 84.58,8.57 | C168.1 84.58,7.3 | 84.58,7.3 84.58,8.57 | v79.5,24.13 79.5,7.3 84.58,7.3 | v72.83,23.5 C172.2 | C159.1 84.58,22.54
-15V  (via drill 0.3)
  Top 0.61: IC2.11 v57.47,11.75 | IC3.11 v42.23,11.75 | IC5.11 v26.35,11.75 | IC4.11 v11.11,11.75 | v7.3,6.99 7.3,4.13 2.22,4.13 0.64,5.71 0.64,26.99 2.54,28.89 v6.67,28.89 | C2.- 19.68,27.3 21.59,27.3 22.54,28.26 23.81,28.26 24.77,27.3 v26.04,27.3 IC1.27
  Bottom 0.254: C43.2 38.52,8.99 38.73,9.21 | C42.2 22.54,9.21
  Bottom 0.61: 53.76,8.57 51.44,8.57 51.44,12.7 42.23,12.7 v42.23,11.75 42.23,9.21 38.73,9.21 36.2,9.21 36.2,12.7 26.35,12.7 v26.35,11.75 26.35,9.21 22.54,9.21 20.32,9.21 20.32,12.7 11.11,12.7 v11.11,11.75 11.11,9.21 7.52,9.21 C41.2 v7.3,6.99 | v57.47,11.75 57.47,8.57 53.76,8.57 | 53.76,8.57 C44.2 | R1.1 12.06,31.43 18.03,31.43 C2.- v6.67,28.89 | C1.1 v26.04,27.3
-15V1  (via drill 0.3)
  Top 0.61: IC6.11 v57.47,45.53 | IC7.11 v42.23,45.53 | IC8.11 v26.35,45.53 | IC9.11 v11.11,45.53 | v7.3,40.77 7.3,37.91 2.22,37.91 0.64,39.5 0.64,60.77 2.54,62.67 v6.67,62.67 | C82.- 19.68,61.09 21.59,61.09 22.54,62.04 23.81,62.04 24.77,61.09 v26.04,61.09 IC10.27
  Bottom 0.254: C87.2 38.52,42.77 38.73,42.99 | C86.2 22.54,42.99
  Bottom 0.61: 53.76,42.35 51.44,42.35 51.44,46.48 42.23,46.48 v42.23,45.53 42.23,42.99 38.73,42.99 36.2,42.99 36.2,46.48 26.35,46.48 v26.35,45.53 26.35,42.99 22.54,42.99 20.32,42.99 20.32,46.48 11.11,46.48 v11.11,45.53 11.11,42.99 7.52,42.99 C85.2 v7.3,40.77 | v57.47,45.53 57.47,42.35 53.76,42.35 | 53.76,42.35 C88.2 | R68.1 12.06,65.22 18.03,65.22 C82.- v6.67,62.67 | C81.1 v26.04,61.09
-15V2  (via drill 0.3)
  Top 0.61: IC11.11 v57.47,79.31 | IC12.11 v42.23,79.31 | IC13.11 v26.35,79.31 | IC14.11 v11.11,79.31 | v7.3,74.55 7.3,71.69 2.22,71.69 0.64,73.28 0.64,94.55 2.54,96.46 v6.67,96.46 | C126.- 19.68,94.87 21.59,94.87 22.54,95.82 23.81,95.82 24.77,94.87 v26.04,94.87 IC15.27
  Bottom 0.254: C131.2 38.52,76.56 38.73,76.77 | C130.2 22.54,76.77
  Bottom 0.61: 53.76,76.14 51.44,76.14 51.44,80.26 42.23,80.26 v42.23,79.31 42.23,76.77 38.73,76.77 36.2,76.77 36.2,80.26 26.35,80.26 v26.35,79.31 26.35,76.77 22.54,76.77 20.32,76.77 20.32,80.26 11.11,80.26 v11.11,79.31 11.11,76.77 7.52,76.77 C129.2 v7.3,74.55 | v57.47,79.31 57.47,76.14 53.76,76.14 | 53.76,76.14 C132.2 | R102.1 12.06,99 18.03,99 C126.- v6.67,96.46 | C125.1 v26.04,94.87
-15V3  (via drill 0.3)
  Top 0.61: IC16.11 v88.08,57.47 | IC17.11 v88.08,42.23 | IC18.11 v88.08,26.35 | IC19.11 v88.08,11.11 | v92.84,7.3 95.69,7.3 95.69,2.22 94.11,0.64 72.83,0.64 70.93,2.54 v70.93,6.67 | C170.- 72.52,19.68 72.52,21.59 71.56,22.54 71.56,23.81 72.52,24.77 v72.52,26.04 IC20.27
  Bottom 0.254: C175.2 90.83,38.52 90.61,38.73 | C174.2 90.61,22.54
  Bottom 0.61: 91.25,53.76 91.25,51.44 87.12,51.44 87.12,42.23 v88.08,42.23 90.61,42.23 90.61,38.73 90.61,36.2 87.12,36.2 87.12,26.35 v88.08,26.35 90.61,26.35 90.61,22.54 90.61,20.32 87.12,20.32 87.12,11.11 v88.08,11.11 90.61,11.11 90.61,7.52 C173.2 v92.84,7.3 | v88.08,57.47 91.25,57.47 91.25,53.76 | 91.25,53.76 C176.2 | R136.1 68.39,12.06 68.39,18.03 C170.- v70.93,6.67 | C169.1 v72.52,26.04
A0  (via drill 0.3)
  Top 0.254: v38.73,28.89 IC1.17
  Bottom 0.254: v38.73,28.89 40.64,30.8 61.28,30.8 64.77,27.3 64.77,5.08 U$1.5
A1  (via drill 0.3)
  Top 0.254: IC1.16 v40.01,28.89 40.06,30.16 IC1.16
  Bottom 0.254: v40.01,28.89 41.27,30.16 60.96,30.16 64.14,26.99 64.14,5.4 62.55,3.81 60.96,3.81 U$1.4
A2  (via drill 0.3)
  Top 0.254: IC1.15 v41.27,28.89
  Bottom 0.254: v41.27,28.89 41.91,29.53 60.64,29.53 63.5,26.67 63.5,5.71 62.23,4.45 59.05,4.45 U$1.3
A3  (via drill 0.3)
  Top 0.254: IC1.14 41.33,20.05 41.27,20.95 42.55,20.95 v42.55,21.91
  Bottom 0.254: v42.55,21.91 59.37,21.91 62.87,18.41 62.87,6.03 61.91,5.08 57.15,5.08 U$1.2
A4  (via drill 0.3)
  Top 0.254: IC10.14 41.33,53.84 41.27,54.74 42.55,54.74 v42.55,55.69
  Bottom 0.254: v42.55,55.69 59.37,55.69 62.87,52.2 62.87,39.81 61.91,38.86 57.15,38.86 U$2.2
A5  (via drill 0.3)
  Top 0.254: v38.73,62.67 IC10.17
  Bottom 0.254: v38.73,62.67 40.64,64.58 61.28,64.58 64.77,61.09 64.77,38.86 U$2.5
A6  (via drill 0.3)
  Top 0.254: IC10.16 v40.01,62.67 40.06,63.94 IC10.16
  Bottom 0.254: v40.01,62.67 41.27,63.94 60.96,63.94 64.14,60.77 64.14,39.18 62.55,37.59 60.96,37.59 U$2.4
A7  (via drill 0.3)
  Top 0.254: IC10.15 v41.27,62.67
  Bottom 0.254: v41.27,62.67 41.91,63.31 60.64,63.31 63.5,60.45 63.5,39.5 62.23,38.23 59.05,38.23 U$2.3
A8  (via drill 0.3)
  Top 0.254: IC15.14 41.33,87.62 41.27,88.52 42.55,88.52 v42.55,89.47
  Bottom 0.254: v42.55,89.47 59.37,89.47 62.87,85.98 62.87,73.6 61.91,72.64 57.15,72.64 U$3.2
A9  (via drill 0.3)
  Top 0.254: v38.73,96.46 IC15.17
  Bottom 0.254: v38.73,96.46 40.64,98.36 61.28,98.36 64.77,94.87 64.77,72.64 U$3.5
A10  (via drill 0.3)
  Top 0.254: IC15.16 v40.01,96.46 40.06,97.73 IC15.16
  Bottom 0.254: v40.01,96.46 41.27,97.73 60.96,97.73 64.14,94.55 64.14,72.96 62.55,71.37 60.96,71.37 U$3.4
A11  (via drill 0.3)
  Top 0.254: IC15.15 v41.27,96.46
  Bottom 0.254: v41.27,96.46 41.91,97.09 60.64,97.09 63.5,94.23 63.5,73.28 62.23,72.01 59.05,72.01 U$3.3
A12  (via drill 0.3)
  Top 0.254: IC20.14 79.77,41.33 78.87,41.27 78.87,42.55 v77.92,42.55
  Bottom 0.254: v77.92,42.55 77.92,59.37 81.41,62.87 93.79,62.87 94.74,61.91 94.74,57.15 U$4.2
A13  (via drill 0.3)
  Top 0.254: v70.93,38.73 IC20.17
  Bottom 0.254: v70.93,38.73 69.03,40.64 69.03,61.28 72.52,64.77 94.74,64.77 U$4.5
A14  (via drill 0.3)
  Top 0.254: IC20.16 v70.93,40.01 69.66,40.06 IC20.16
  Bottom 0.254: v70.93,40.01 69.66,41.27 69.66,60.96 72.83,64.14 94.42,64.14 96.01,62.55 96.01,60.96 U$4.4
A15  (via drill 0.3)
  Top 0.254: IC20.15 v70.93,41.27
  Bottom 0.254: v70.93,41.27 70.29,41.91 70.29,60.64 73.15,63.5 94.11,63.5 95.38,62.23 95.38,59.05 U$4.3
AGND  (via drill 0.3)
  Top 0.61: C25.1 C24.1 | C24.1 C23.1 C22.1 C29.1 C28.1 C27.1 C26.1 | C11.1 v44.45,25.4 | v60.33,27.94 62.23,26.04 C4.1 62.23,24.45 | C10.1 v46.99,25.4 | C9.1 v49.53,25.4 | C8.1 v52.07,25.4 | C7.1 v54.61,25.4 | C6.1 v57.15,25.4 | C5.1 v59.69,25.4 | C2.+ 19.05,30.48 14.29,30.48 C3.- 12.7,28.89 9.53,28.89 7.62,26.99 6.35,26.99 | IC1.12 v38.73,17.78 | 6.35,26.99 v5.08,26.99 | C24.1 6.35,26.99
  Bottom 0.61: C44.1 53.66,10.79 | 53.66,10.79 52.39,10.79 52.39,13.97 40.96,13.97 40.96,10.79 38.42,10.79 | v60.33,27.94 60.33,25.4 v59.69,25.4 v57.15,25.4 v54.61,25.4 v52.07,25.4 v49.53,25.4 v46.99,25.4 v44.45,25.4 44.45,26.67 34.92,26.67 | 25.72,29.84 34.92,29.84 34.92,26.67 | 25.72,29.84 23.5,29.84 | 23.5,29.84 21.59,29.84 C2.+ | SV1.4 7.3,4.13 6.03,4.13 4.13,6.03 4.13,13.65 | 4.13,13.65 4.13,26.04 v5.08,26.99 | C43.1 38.42,10.79 | 38.42,10.79 37.15,10.79 37.15,12.38 | 37.15,12.38 37.15,13.97 25.08,13.97 25.08,10.79 22.54,10.79 | C13.2 37.25,12.48 37.15,12.38 | C12.2 53.66,10.79 | 22.54,10.79 21.27,10.79 21.27,12.7 | 21.27,12.7 21.27,13.97 9.84,13.97 9.84,10.79 7.41,10.79 C41.1 | C31.2 21.49,12.48 21.27,12.7 | C42.1 22.54,10.79 | C30.2 C41.1 | 4.13,13.65 6.03,13.65 6.03,10.79 7.2,10.79 C41.1 | v38.73,17.78 38.73,21.27 34.92,25.08 34.92,26.67 | C1.2 25.82,29.74 25.72,29.84 | C40.1 23.5,29.84
AGND1  (via drill 0.3)
  Top 0.61: C72.1 C73.1 | C73.1 C74.1 C75.1 C63.1 C64.1 C65.1 C66.1 | C54.1 v44.45,59.18 | v60.33,61.72 62.23,59.82 C50.1 62.23,58.23 | C55.1 v46.99,59.18 | C56.1 v49.53,59.18 | C57.1 v52.07,59.18 | C45.1 v54.61,59.18 | C46.1 v57.15,59.18 | C47.1 v59.69,59.18 | C82.+ 19.05,64.26 14.29,64.26 C83.- 12.7,62.67 9.53,62.67 7.62,60.77 6.35,60.77 | IC10.12 v38.73,51.56 | 6.35,60.77 v5.08,60.77 | C73.1 6.35,60.77
  Bottom 0.61: C88.1 53.66,44.58 | 53.66,44.58 52.39,44.58 52.39,47.75 40.96,47.75 40.96,44.58 38.42,44.58 | v60.33,61.72 60.33,59.18 v59.69,59.18 v57.15,59.18 v54.61,59.18 v52.07,59.18 v49.53,59.18 v46.99,59.18 v44.45,59.18 44.45,60.45 34.92,60.45 | 25.72,63.63 34.92,63.63 34.92,60.45 | 25.72,63.63 23.5,63.63 | 23.5,63.63 21.59,63.63 C82.+ | SV2.4 7.3,37.91 6.03,37.91 4.13,39.81 4.13,47.43 | 4.13,47.43 4.13,59.82 v5.08,60.77 | C87.1 38.42,44.58 | 38.42,44.58 37.15,44.58 37.15,46.16 | 37.15,46.16 37.15,47.75 25.08,47.75 25.08,44.58 22.54,44.58 | C62.2 37.25,46.27 37.15,46.16 | C53.2 53.66,44.58 | 22.54,44.58 21.27,44.58 21.27,46.48 | 21.27,46.48 21.27,47.75 9.84,47.75 9.84,44.58 7.41,44.58 C85.1 | C71.2 21.49,46.27 21.27,46.48 | C86.1 22.54,44.58 | C80.2 C85.1 | 4.13,47.43 6.03,47.43 6.03,44.58 7.2,44.58 C85.1 | v38.73,51.56 38.73,55.05 34.92,58.86 34.92,60.45 | C81.2 25.82,63.52 25.72,63.63 | C84.1 23.5,63.63
AGND2  (via drill 0.3)
  Top 0.61: C116.1 C117.1 | C117.1 C118.1 C119.1 C107.1 C108.1 C109.1 C110.1 | C98.1 v44.45,92.96 | v60.33,95.5 62.23,93.6 C94.1 62.23,92.01 | C99.1 v46.99,92.96 | C100.1 v49.53,92.96 | C101.1 v52.07,92.96 | C89.1 v54.61,92.96 | C90.1 v57.15,92.96 | C91.1 v59.69,92.96 | C126.+ 19.05,98.04 14.29,98.04 C127.- 12.7,96.46 9.53,96.46 7.62,94.55 6.35,94.55 | IC15.12 v38.73,85.34 | 6.35,94.55 v5.08,94.55 | C117.1 6.35,94.55
  Bottom 0.61: C132.1 53.66,78.36 | 53.66,78.36 52.39,78.36 52.39,81.53 40.96,81.53 40.96,78.36 38.42,78.36 | v60.33,95.5 60.33,92.96 v59.69,92.96 v57.15,92.96 v54.61,92.96 v52.07,92.96 v49.53,92.96 v46.99,92.96 v44.45,92.96 44.45,94.23 34.92,94.23 | 25.72,97.41 34.92,97.41 34.92,94.23 | 25.72,97.41 23.5,97.41 | 23.5,97.41 21.59,97.41 C126.+ | SV3.4 7.3,71.69 6.03,71.69 4.13,73.6 4.13,81.22 | 4.13,81.22 4.13,93.6 v5.08,94.55 | C131.1 38.42,78.36 | 38.42,78.36 37.15,78.36 37.15,79.95 | 37.15,79.95 37.15,81.53 25.08,81.53 25.08,78.36 22.54,78.36 | C106.2 37.25,80.05 37.15,79.95 | C97.2 53.66,78.36 | 22.54,78.36 21.27,78.36 21.27,80.26 | 21.27,80.26 21.27,81.53 9.84,81.53 9.84,78.36 7.41,78.36 C129.1 | C115.2 21.49,80.05 21.27,80.26 | C130.1 22.54,78.36 | C124.2 C129.1 | 4.13,81.22 6.03,81.22 6.03,78.36 7.2,78.36 C129.1 | v38.73,85.34 38.73,88.84 34.92,92.65 34.92,94.23 | C125.2 25.82,97.31 25.72,97.41 | C128.1 23.5,97.41
AGND3  (via drill 0.3)
  Top 0.61: C160.1 C161.1 | C161.1 C162.1 C163.1 C151.1 C152.1 C153.1 C154.1 | C142.1 v74.42,44.45 | v71.88,60.33 73.79,62.23 C138.1 75.37,62.23 | C143.1 v74.42,46.99 | C144.1 v74.42,49.53 | C145.1 v74.42,52.07 | C133.1 v74.42,54.61 | C134.1 v74.42,57.15 | C135.1 v74.42,59.69 | C170.+ 69.34,19.05 69.34,14.29 C171.- 70.93,12.7 70.93,9.53 72.83,7.62 72.83,6.35 | IC20.12 v82.04,38.73 | 72.83,6.35 v72.83,5.08 | C161.1 72.83,6.35
  Bottom 0.61: C176.1 89.03,53.66 | 89.03,53.66 89.03,52.39 85.85,52.39 85.85,40.96 89.03,40.96 89.03,38.42 | v71.88,60.33 74.42,60.33 v74.42,59.69 v74.42,57.15 v74.42,54.61 v74.42,52.07 v74.42,49.53 v74.42,46.99 v74.42,44.45 73.15,44.45 73.15,34.92 | 69.98,25.72 69.98,34.92 73.15,34.92 | 69.98,25.72 69.98,23.5 | 69.98,23.5 69.98,21.59 C170.+ | SV4.4 95.69,7.3 95.69,6.03 93.79,4.13 86.17,4.13 | 86.17,4.13 73.79,4.13 v72.83,5.08 | C175.1 89.03,38.42 | 89.03,38.42 89.03,37.15 87.44,37.15 | 87.44,37.15 85.85,37.15 85.85,25.08 89.03,25.08 89.03,22.54 | C150.2 87.34,37.25 87.44,37.15 | C141.2 89.03,53.66 | 89.03,22.54 89.03,21.27 87.12,21.27 | 87.12,21.27 85.85,21.27 85.85,9.84 89.03,9.84 89.03,7.41 C173.1 | C159.2 87.34,21.49 87.12,21.27 | C174.1 89.03,22.54 | C168.2 C173.1 | 86.17,4.13 86.17,6.03 89.03,6.03 89.03,7.2 C173.1 | v82.04,38.73 78.55,38.73 74.74,34.92 73.15,34.92 | C169.2 70.08,25.82 69.98,25.72 | C172.1 69.98,23.5
DAC  (via drill 0.3)
  Top 0.254: IC1.28 24.77,31.43 1.27,31.43 v0.95,31.11
  Bottom 0.254: SV1.1 0.64,3.17 0.64,30.8 v0.95,31.11
DAC1  (via drill 0.3)
  Top 0.254: IC10.28 24.77,65.22 1.27,65.22 v0.95,64.9
  Bottom 0.254: SV2.1 0.64,36.96 0.64,64.58 v0.95,64.9
DAC2  (via drill 0.3)
  Top 0.254: IC15.28 24.77,99 1.27,99 v0.95,98.68
  Bottom 0.254: SV3.1 0.64,70.74 0.64,98.36 v0.95,98.68
DAC3  (via drill 0.3)
  Top 0.254: IC20.28 68.39,24.77 68.39,1.27 v68.71,0.95
  Bottom 0.254: SV4.1 96.65,0.64 69.03,0.64 v68.71,0.95
DGND
  pour Bottom: 36.51,32.7 36.51,27.94 42.55,27.94 43.5,28.89 60.33,28.89 61.28,27.94 61.28,22.54 41.59,22.86 41.59,20.95 58.42,20.95 61.28,18.1 61.59,15.24 61.59,7.3 60.01,5.71 53.66,5.71 50.8,2.86 50.8,-0.64 66.36,-0.64 66.67,-0.32 66.67,32.7
DGND1
  pour Bottom: 36.51,66.48 36.51,61.72 42.55,61.72 43.5,62.67 60.33,62.67 61.28,61.72 61.28,56.32 41.59,56.64 41.59,54.74 58.42,54.74 61.28,51.88 61.59,49.02 61.59,41.08 60.01,39.5 53.66,39.5 50.8,36.64 50.8,33.15 66.36,33.15 66.67,33.46 66.67,66.48
DGND2
  pour Bottom: 36.51,100.27 36.51,95.5 42.55,95.5 43.5,96.46 60.33,96.46 61.28,95.5 61.28,90.11 41.59,90.42 41.59,88.52 58.42,88.52 61.28,85.66 61.59,82.8 61.59,74.87 60.01,73.28 53.66,73.28 50.8,70.42 50.8,66.93 66.36,66.93 66.67,67.25 66.67,100.27
DGND3
  pour Bottom: 67.12,36.51 71.88,36.51 71.88,42.55 70.93,43.5 70.93,60.33 71.88,61.28 77.28,61.28 76.96,41.59 78.87,41.59 78.87,58.42 81.72,61.28 84.58,61.59 92.52,61.59 94.11,60.01 94.11,53.66 96.96,50.8 100.46,50.8 100.46,66.36 100.14,66.67 67.12,66.67
EN  (via drill 0.3)
  Top 0.254: IC1.18 v37.47,28.89
  Bottom 0.254: U$1.6 64.77,4.13 65.41,4.76 65.41,27.62 61.59,31.43 40.01,31.43 v37.47,28.89
EN1  (via drill 0.3)
  Top 0.254: IC10.18 v37.47,62.67
  Bottom 0.254: U$2.6 64.77,37.91 65.41,38.54 65.41,61.4 61.59,65.22 40.01,65.22 v37.47,62.67
EN2  (via drill 0.3)
  Top 0.254: IC15.18 v37.47,96.46
  Bottom 0.254: U$3.6 64.77,71.69 65.41,72.33 65.41,95.19 61.59,99 40.01,99 v37.47,96.46
EN3  (via drill 0.3)
  Top 0.254: IC20.18 v70.93,37.47
  Bottom 0.254: U$4.6 95.69,64.77 95.06,65.41 72.2,65.41 68.39,61.59 68.39,40.01 v70.93,37.47
IN1
  Top 0.254: IC2.12 57.47,13.02 57.15,13.34 57.15,16.51 59.69,19.05 60.64,19.05 62.23,20.64 C4.2
  Top 0.305: IC1.19 36.2,28.89 36.83,28.26 58.74,28.26 60.96,26.04 60.96,23.05 C4.2
IN2
  Top 0.254: IC6.12 57.47,46.8 57.15,47.12 57.15,50.29 59.69,52.83 60.64,52.83 62.23,54.42 C50.2
  Top 0.305: IC10.19 36.2,62.67 36.83,62.04 58.74,62.04 60.96,59.82 60.96,56.83 C50.2
IN3
  Top 0.254: IC2.10 56.83,10.48 56.52,10.79 56.52,16.83 59.69,20 C5.2
  Top 0.305: IC1.20 34.92,28.89 36.2,27.62 56.52,27.62 58.42,25.72 58.42,23.05 C5.2
IN4
  Top 0.254: IC2.5 55.56,10.48 55.88,10.79 55.88,17.14 57.15,18.41 57.15,21.59 57.34,21.78 C6.2
  Top 0.305: IC1.21 33.66,28.89 35.56,26.99 54.93,26.99 55.88,26.04 55.88,23.05 C6.2
IN5
  Top 0.254: IC6.10 56.83,44.26 56.52,44.58 56.52,50.61 59.69,53.78 C47.2
  Top 0.305: IC10.20 34.92,62.67 36.2,61.4 56.52,61.4 58.42,59.5 58.42,56.83 C47.2
IN6
  Top 0.254: IC2.3 54.93,13.02 55.24,13.34 55.24,17.14 54.61,17.78 C7.2
  Top 0.305: IC1.22 32.38,28.89 34.92,26.35 53.02,26.35 53.34,26.04 53.34,23.05 C7.2
IN7
  Top 0.254: IC6.5 55.56,44.26 55.88,44.58 55.88,50.93 57.15,52.2 57.15,55.37 57.34,55.56 C46.2
  Top 0.305: IC10.21 33.66,62.67 35.56,60.77 54.93,60.77 55.88,59.82 55.88,56.83 C46.2
IN8
  Top 0.254: IC6.3 54.93,46.8 55.24,47.12 55.24,50.93 54.61,51.56 C45.2
  Top 0.305: IC10.22 32.38,62.67 34.92,60.13 53.02,60.13 53.34,59.82 53.34,56.83 C45.2
IN9  (via drill 0.3)
  Top 0.254: IC3.12 42.23,13.02 41.91,13.34 41.91,16.51 44.13,16.51 44.13,18.41 44.77,19.05 50.48,19.05 52.07,20.64 C8.2
  Top 0.305: IC1.23 31.11,28.89 34.29,25.72 v42.86,25.72 | v52.07,23.18 C8.2
  Bottom 0.305: v42.86,25.72 44.13,24.45 50.8,24.45 v52.07,23.18
IN10  (via drill 0.3)
  Top 0.254: IC7.12 42.23,46.8 41.91,47.12 41.91,50.29 44.13,50.29 44.13,52.2 44.77,52.83 50.48,52.83 52.07,54.42 C57.2
  Top 0.305: IC10.23 31.11,62.67 34.29,59.5 v42.86,59.5 | v52.07,56.96 C57.2
  Bottom 0.305: v42.86,59.5 44.13,58.23 50.8,58.23 v52.07,56.96
IN11  (via drill 0.3)
  Top 0.254: IC3.10 41.59,10.48 41.27,10.79 41.27,17.14 43.5,17.14 43.5,18.73 44.45,19.68 48.58,19.68 49.53,20.64 C9.2
  Top 0.305: IC1.24 29.84,28.89 33.66,25.08 42.55,25.08 v42.86,24.77 | v49.53,23.18 C9.2
  Bottom 0.305: v42.86,24.77 43.81,23.81 48.9,23.81 v49.53,23.18
IN12
  Top 0.254: IC3.5 40.32,10.48 40.64,10.79 40.64,17.78 42.86,17.78 42.86,19.05 44.13,20.32 46.67,20.32 46.99,20.64 C10.2
  Top 0.305: IC1.25 28.57,28.89 33.02,24.45 41.91,24.45 43.18,23.18 46.67,23.18 46.99,22.86 C10.2
IN13  (via drill 0.3)
  Top 0.254: IC7.10 41.59,44.26 41.27,44.58 41.27,50.93 43.5,50.93 43.5,52.51 44.45,53.47 48.58,53.47 49.53,54.42 C56.2
  Top 0.305: IC10.24 29.84,62.67 33.66,58.86 42.55,58.86 v42.86,58.55 | v49.53,56.96 C56.2
  Bottom 0.305: v42.86,58.55 43.81,57.59 48.9,57.59 v49.53,56.96
IN14
  Top 0.254: IC3.3 39.69,13.02 40.01,13.34 40.01,18.41 42.23,18.41 42.23,19.37 44.13,21.27 44.45,21.27 C11.2
  Top 0.305: IC1.26 27.3,28.89 32.38,23.81 41.59,23.81 42.86,22.54 43.37,22.54 C11.2
IN15
  Top 0.254: IC7.5 40.32,44.26 40.64,44.58 40.64,51.56 42.86,51.56 42.86,52.83 44.13,54.1 46.67,54.1 46.99,54.42 C55.2
  Top 0.305: IC10.25 28.57,62.67 33.02,58.23 41.91,58.23 43.18,56.96 46.67,56.96 46.99,56.64 C55.2
IN16
  Top 0.254: IC7.3 39.69,46.8 40.01,47.12 40.01,52.2 42.23,52.2 42.23,53.15 44.13,55.05 44.45,55.05 C54.2
  Top 0.305: IC10.26 27.3,62.67 32.38,57.59 41.59,57.59 42.86,56.33 43.37,56.33 C54.2
IN17  (via drill 0.3)
  Top 0.254: IC5.12 26.35,13.02 26.04,13.34 26.04,18.41 23.81,18.41 23.81,19.37 21.91,21.27 22.09,21.27 C26.2 21.59,22.23 22.54,22.23 v23.5,21.27 | IC1.11 v37.47,21.27
  Bottom 0.254: v37.47,21.27 v23.5,21.27
IN18  (via drill 0.3)
  Top 0.254: IC8.3 23.81,46.8 24.13,47.12 24.13,50.29 21.91,50.29 21.91,52.2 21.27,52.83 15.56,52.83 13.97,54.42 C63.2 v13.97,56.96 | IC10.8 v33.66,56.96
  Bottom 0.254: v33.66,56.96 33.02,57.59 14.61,57.59 v13.97,56.96
IN19  (via drill 0.3)
  Top 0.254: IC5.10 25.72,10.48 25.4,10.79 25.4,17.78 23.18,17.78 23.18,19.05 21.91,20.32 19.37,20.32 19.05,20.64 C27.2 19.05,22.86 19.37,23.18 22.86,23.18 v23.5,22.54 | IC1.10 v36.2,21.91
  Bottom 0.254: v36.2,21.91 33.02,21.91 32.38,22.54 v23.5,22.54
IN20  (via drill 0.3)
  Top 0.254: IC5.5 24.45,10.48 24.77,10.79 24.77,17.14 22.54,17.14 22.54,18.73 21.59,19.68 17.46,19.68 16.51,20.64 C28.2 v16.51,23.18 | IC1.9 v34.92,22.54
  Bottom 0.254: v34.92,22.54 33.34,22.54 32.7,23.18 v16.51,23.18
IN21  (via drill 0.3)
  Top 0.254: IC8.5 24.45,44.26 24.77,44.58 24.77,50.93 22.54,50.93 22.54,52.51 21.59,53.47 17.46,53.47 16.51,54.42 C64.2 v16.51,56.96 | IC10.9 v34.92,56.33
  Bottom 0.254: v34.92,56.33 33.34,56.33 32.7,56.96 v16.51,56.96
IN22  (via drill 0.3)
  Top 0.254: IC5.3 23.81,13.02 24.13,13.34 24.13,16.51 21.91,16.51 21.91,18.41 21.27,19.05 15.56,19.05 13.97,20.64 C29.2 v13.97,23.18 | IC1.8 v33.66,23.18
  Bottom 0.254: v33.66,23.18 33.02,23.81 14.61,23.81 v13.97,23.18
IN23  (via drill 0.3)
  Top 0.254: IC8.10 25.72,44.26 25.4,44.58 25.4,51.56 23.18,51.56 23.18,52.83 21.91,54.1 19.37,54.1 19.05,54.42 C65.2 19.05,56.64 19.37,56.96 22.86,56.96 v23.5,56.33 | IC10.10 v36.2,55.69
  Bottom 0.254: v36.2,55.69 33.02,55.69 32.38,56.33 v23.5,56.33
IN24  (via drill 0.3)
  Top 0.254: IC8.12 26.35,46.8 26.04,47.12 26.04,52.2 23.81,52.2 23.81,53.15 21.91,55.05 22.09,55.05 C66.2 21.59,56.01 22.54,56.01 v23.5,55.05 | IC10.11 v37.47,55.05
  Bottom 0.254: v37.47,55.05 v23.5,55.05
IN25  (via drill 0.3)
  Top 0.254: IC4.12 11.11,13.02 10.79,13.34 10.79,17.14 11.43,17.78 C22.2 v11.43,23.18 | IC1.7 32.38,22.54 v30.48,24.45
  Bottom 0.254: v30.48,24.45 12.7,24.45 v11.43,23.18
IN26  (via drill 0.3)
  Top 0.254: IC9.3 8.57,46.8 8.89,47.12 8.89,50.29 6.35,52.83 5.4,52.83 3.81,54.42 C72.2 3.81,56.64 4.13,56.96 v6.35,56.96 | IC10.4 28.57,57.28 v25.72,60.13
  Bottom 0.254: v25.72,60.13 7.94,60.13 6.35,58.55 v6.35,56.96
IN27  (via drill 0.3)
  Top 0.254: IC4.10 10.48,10.48 10.16,10.79 10.16,17.14 8.89,18.41 C23.2 v8.89,23.18 | IC1.6 31.11,22.86 v28.89,25.08
  Bottom 0.254: v28.89,25.08 10.79,25.08 v8.89,23.18
IN28  (via drill 0.3)
  Top 0.254: IC4.5 9.21,10.48 9.53,10.79 9.53,16.83 6.35,20 C24.2 7.62,23.05 v7.62,23.18 | IC1.5 29.84,23.18 v27.3,25.72
  Bottom 0.254: v27.3,25.72 8.57,25.72 7.62,24.77 v7.62,23.18
IN29  (via drill 0.3)
  Top 0.254: IC9.5 9.21,44.26 9.53,44.58 9.53,50.61 6.35,53.78 C73.2 7.62,56.83 v7.62,56.96 | IC10.5 29.84,56.96 v27.3,59.5
  Bottom 0.254: v27.3,59.5 8.57,59.5 7.62,58.55 v7.62,56.96
IN30  (via drill 0.3)
  Top 0.254: IC4.3 8.57,13.02 8.89,13.34 8.89,16.51 6.35,19.05 5.4,19.05 3.81,20.64 C25.2 3.81,22.86 4.13,23.18 v6.35,23.18 | IC1.4 28.57,23.5 v25.72,26.35
  Bottom 0.254: v25.72,26.35 7.94,26.35 6.35,24.77 v6.35,23.18
IN31  (via drill 0.3)
  Top 0.254: IC9.10 10.48,44.26 10.16,44.58 10.16,50.93 8.89,52.2 C74.2 v8.89,56.96 | IC10.6 31.11,56.64 v28.89,58.86
  Bottom 0.254: v28.89,58.86 10.79,58.86 v8.89,56.96
IN32  (via drill 0.3)
  Top 0.254: IC9.12 11.11,46.8 10.79,47.12 10.79,50.93 11.43,51.56 C75.2 v11.43,56.96 | IC10.7 32.38,56.33 v30.48,58.23
  Bottom 0.254: v30.48,58.23 12.7,58.23 v11.43,56.96
IN33
  Top 0.254: IC11.12 57.47,80.58 57.15,80.9 57.15,84.07 59.69,86.61 60.64,86.61 62.23,88.2 C94.2
  Top 0.305: IC15.19 36.2,96.46 36.83,95.82 58.74,95.82 60.96,93.6 60.96,90.61 C94.2
IN34
  Top 0.254: IC11.10 56.83,78.04 56.52,78.36 56.52,84.39 59.69,87.57 C91.2
  Top 0.305: IC15.20 34.92,96.46 36.2,95.19 56.52,95.19 58.42,93.28 58.42,90.61 C91.2
IN35
  Top 0.254: IC11.5 55.56,78.04 55.88,78.36 55.88,84.71 57.15,85.98 57.15,89.15 57.34,89.34 C90.2
  Top 0.305: IC15.21 33.66,96.46 35.56,94.55 54.93,94.55 55.88,93.6 55.88,90.61 C90.2
IN36
  Top 0.254: IC11.3 54.93,80.58 55.24,80.9 55.24,84.71 54.61,85.34 C89.2
  Top 0.305: IC15.22 32.38,96.46 34.92,93.92 53.02,93.92 53.34,93.6 53.34,90.61 C89.2